# Altium PCB sonar_rev2.PcbDoc
Units mil, origin at the board's own origin, x right, y up, seen from the top; angles counter-clockwise.
Board outline 6000 x 4000 mil, 2 copper layers (Top Layer, Bottom Layer); 16 components, 15 nets, 30 pads, 0 vias.
Unrouted connection lines stored in the file: 11.
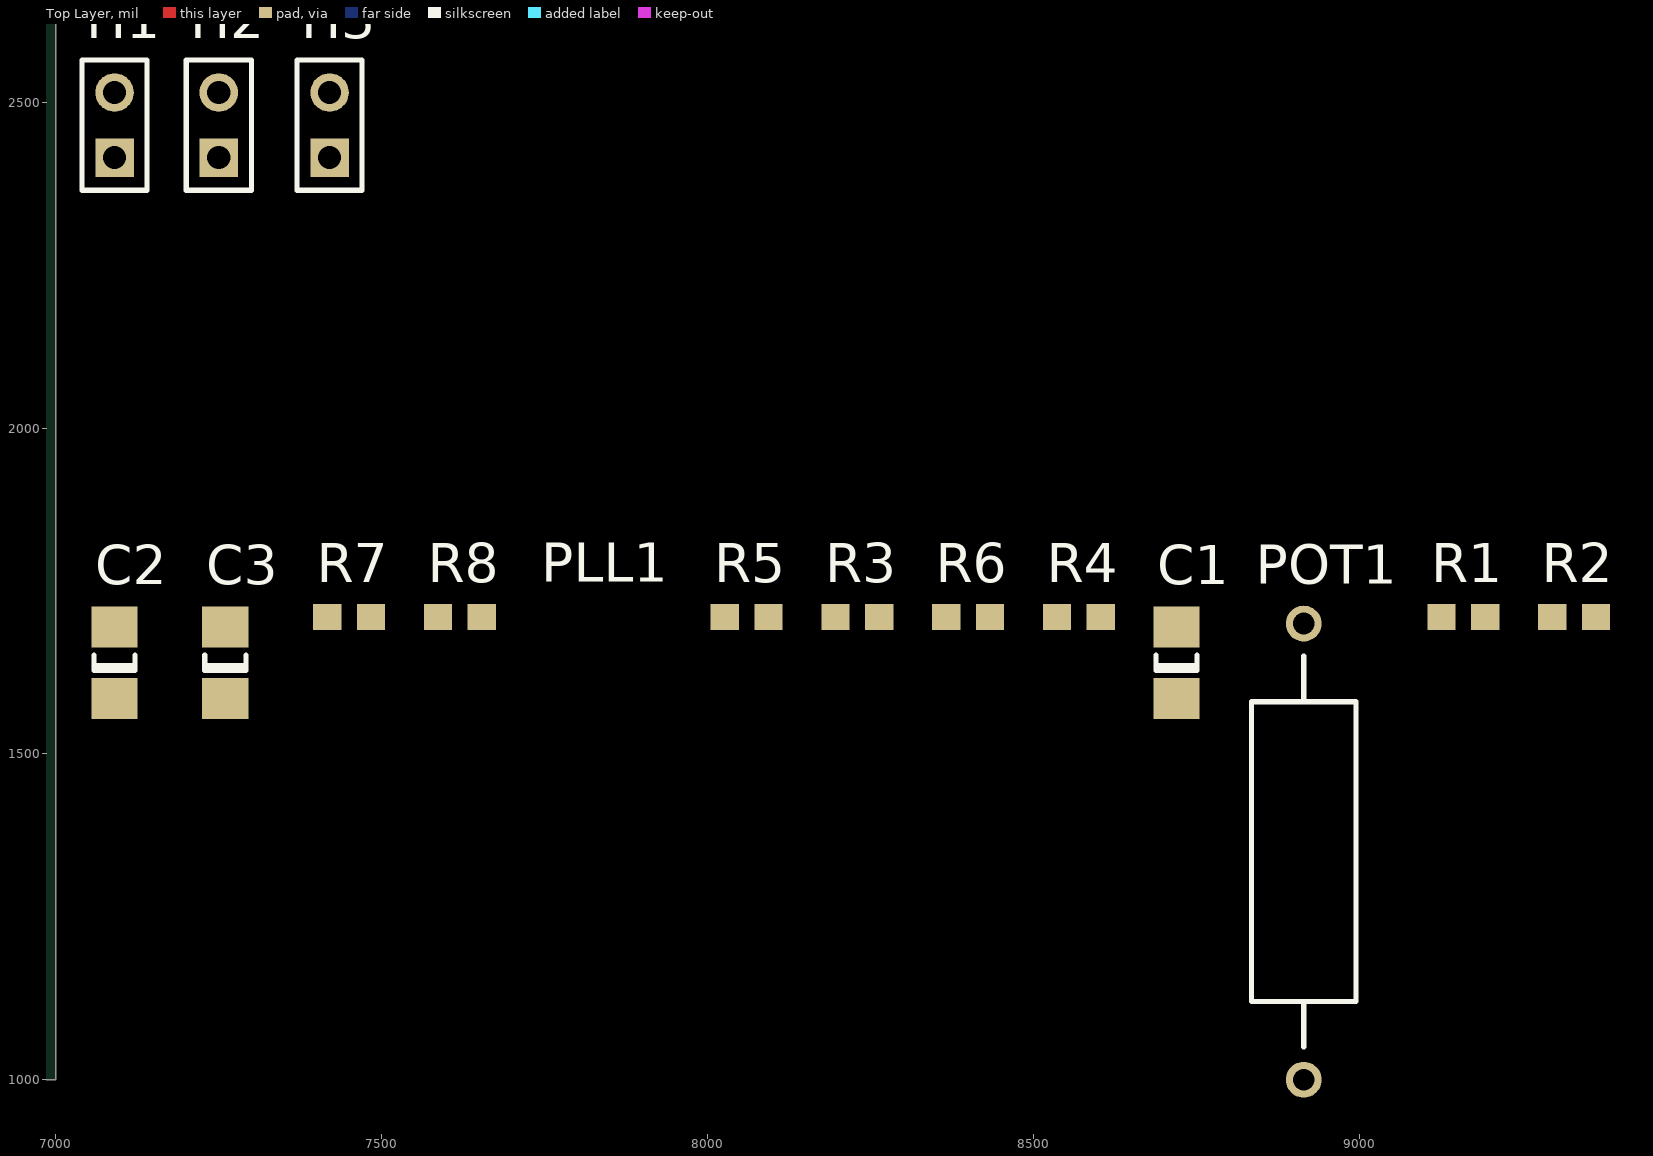
[diagram p0: Top Layer view]
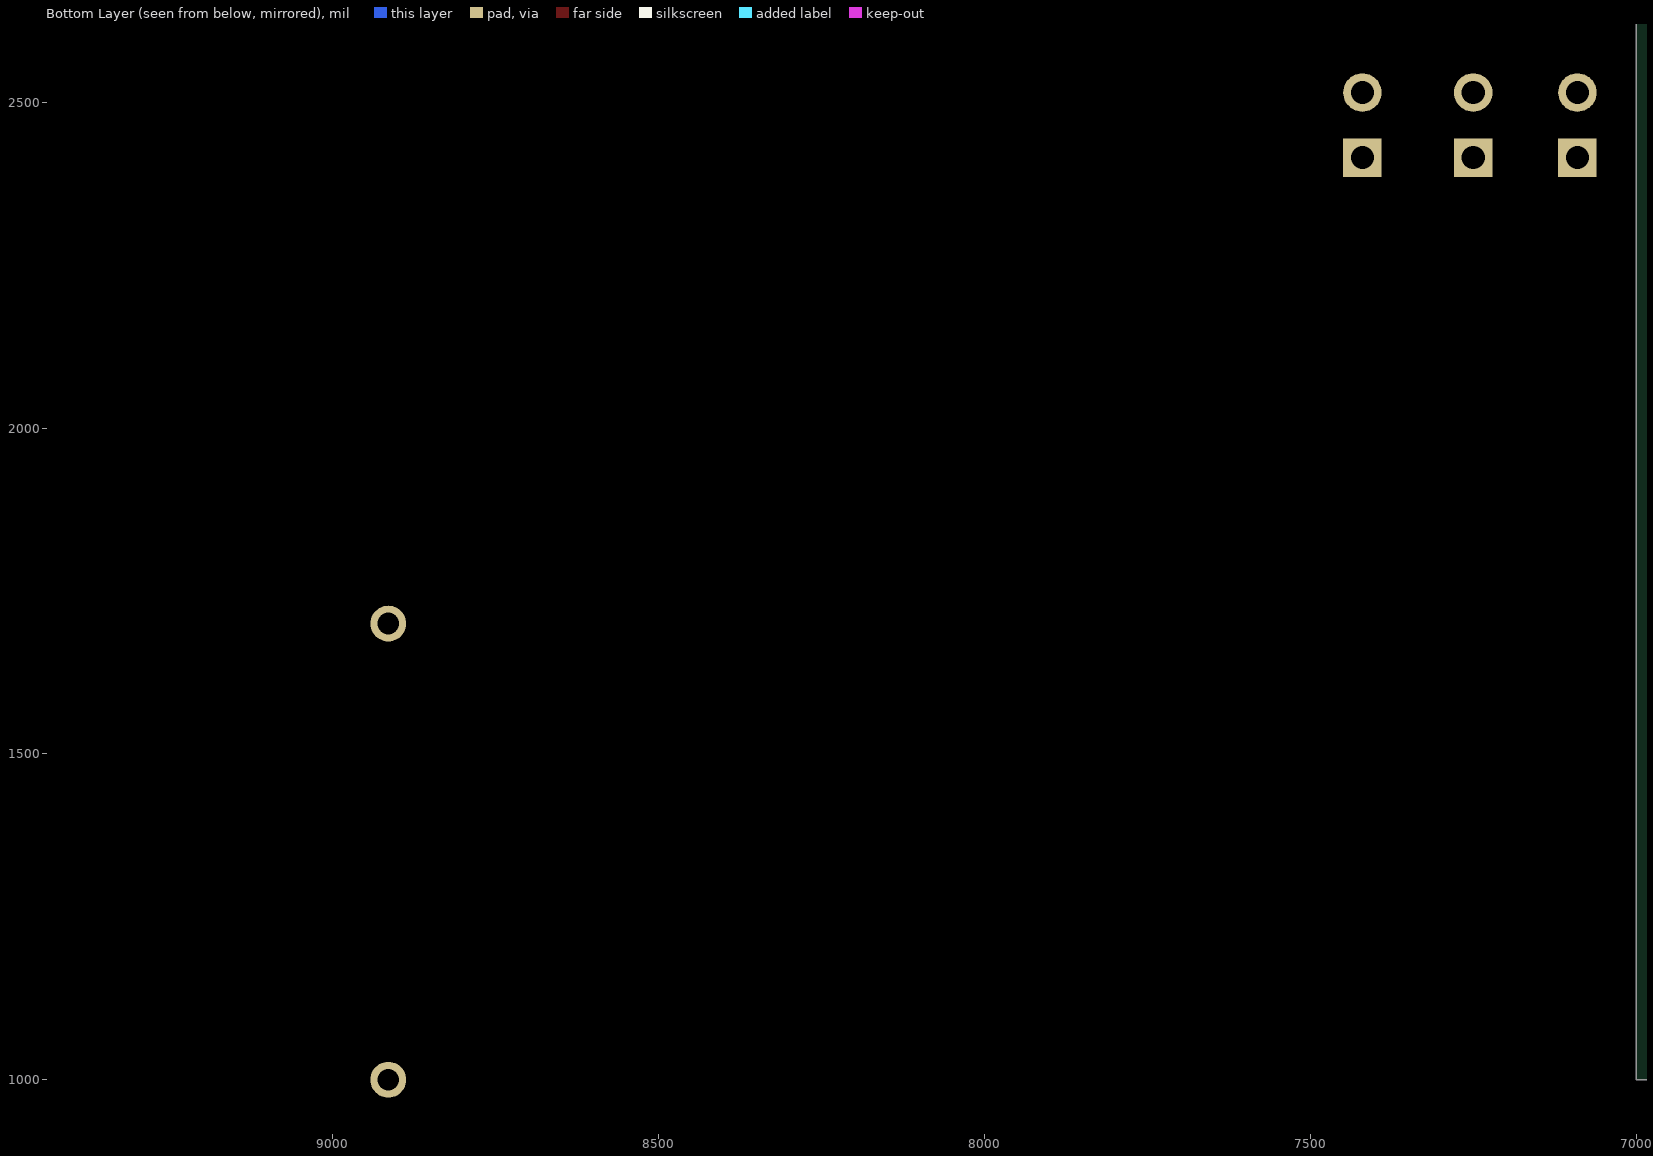
[diagram p1: Bottom Layer view, seen from below]

## Layer stack, top to bottom
Top Layer: signal copper 1.4
Dielectric: dielectric 12.6, FR-4, Dk 4.8
Bottom Layer: signal copper 1.4

## Board outline
1000,1000 7000,1000 7000,5000 1000,5000

## Design rules (kind name [scope] priority, off if disabled: settings)
Clearance [All] p1: gap=10
PolygonConnect [All] p1: connectstyle=Relief reliefconductorwidth=10 reliefentries=4 polygonreliefangle="90 Angle"
RoomDefinition top_level [InComponentClass('top_level')] p1: confinementstyle=ConfineIn formatcopy=TRUE lockcomponents=FALSE outline 7030,2355 7495,2355 7495,2675 7030,2675
RoomDefinition phase_compare [InComponentClass('phase_compare')] p2: confinementstyle=ConfineIn formatcopy=TRUE lockcomponents=FALSE outline 7045,960 9400,960 9400,1840 7045,1840
RoutingVias [All] p1: holewidth=28 width=50 viastyle="Through Hole" minholewidth=28 minwidth=50 maxholewidth=28 maxwidth=50
SilkscreenOverComponentPads [All] p1: minsilkscreentomaskgap=10
SolderMaskExpansion [All] p1: expansion=4
TestPointUsage [All] p1: valid=0 allowmultiple=FALSE
Testpoint [All] p1: side=15 testpointundercomponent=TRUE minsize=40 maxsize=100 preferedsize=60 minholesize=0 maxholesize=40 preferedholesize=32 testpointgrid=1 style=1023 order=0123456789
Width [All] p1: maxlimit=10 minlimit=10 preferedwidth=10
23 further rules are at their usual default settings.

## Classes and differential pairs
component class top_level: H1 H2 H3
component class phase_compare: C1 C2 C3 OP1 OP2 PLL1 POT1 R1 R2 R3 R4 R5 R6 R7 R8

## Components (designator, comment, footprint, x,y, rotation, side; value= is the part's Value field where it differs from the comment)
C1 "Cap Semi" C1206 8720,1640 r90 top
C2 "Cap Semi" C1206 7090,1640 r90 top
C3 "Cap Semi" C1206 7260,1640 r90 top
H1 "Header 2" HDR1X2 7090,2415 r90 top
H2 "Header 2" HDR1X2 7250,2415 r90 top
H3 "Header 2" HDR1X2 7420,2415 r90 top
PLL1 "4046 PLL" 4046PLL 7740,1730 r90 top
POT1 "Res Adj1" AXIAL-0.7 8915,1350 r90 top
R1 "Res3" J1-0603 9160,1710 r0 top
R2 "Res3" J1-0603 9330,1710 r0 top
R3 "Res3" J1-0603 8230,1710 r0 top
R4 "Res3" J1-0603 8570,1710 r0 top
R5 "Res3" J1-0603 8060,1710 r0 top
R6 "Res3" J1-0603 8400,1710 r0 top
R7 "Res3" J1-0603 7450,1710 r0 top
R8 "Res3" J1-0603 7620,1710 r0 top

## Footprints (in the part's own frame and the unit in brackets; to place one, negate y for a bottom-side part, rotate by r counter-clockwise, add the part's x,y. Pads: shape width x height; smd on the part's side, far side on the other; paste and mask are expansions set on the pad)
4046PLL [mil]
AXIAL-0.7 [mm] "Variable Resistor; 2 Leads"
  round 1.4 hole 0.85: 1(-8.89,0) 2(8.89,0)
  silkscreen extent -7.62,-2.03 7.62,2.03
C1206 [mm] "Chip Capacitor; Body 3.2 x 1.6 mm (LxW typ)"
  rect 1.6x1.8 smd: 1(-1.4,0) 2(1.4,0)
  silkscreen extent -0.3,-0.8 0.3,0.8
HDR1X2 [mm] "Connector; Header; 2 Position"
  rect 1.5x1.5 hole 0.9: 1(0,0)
  round 1.5 hole 0.9: 2(2.54,0)
  silkscreen extent -1.27,-1.27 3.81,1.27
J1-0603 [mm] "Chip Resistor; Body 1.6 x 0.8 mm (LxW typ)"
  rect 1.1x1 smd: 1(-0.85,0) 2(0.85,0)

## Part data
C1 C2 C3: "Capacitor (Semiconductor SIM Model)"
H1 H2 H3: "Header, 2-Pin"
PLL1: "CD74HC4046A"
POT1: "Variable Resistor"
R1 R2 R3 R4 R5 R6 R7 R8: "Resistor"

## Nets (pads, with @x,y where several pads share a name; then routed paths per layer and width w, separated by ;. In a path a pad name is that pad's centre, name@x,y a point inside that pad or via, vN(x,y) a via of type N, cw(c..) or ccw(c..) an arc to the next point about the centre after c; other vN are vias at no path point)
5V: 
+12V: R4.1 R6.2
-12V: 
GND: C1.1 C3.1 R3.1 R5.2 R7.2
NetC1_2: C1.2 POT1.2
NetC2_1: C2.1
NetC2_2: C2.2
NetC3_2: C3.2 R8.2
NetOP1_2: R1.2 R2.1
NetPLL1_2: R8.1
NetPLL1_11: R7.1
REF_SINE: POT1.1 R1.1 R3.2
REF_SQ: R4.2
SHIFTED_SINE: R2.2 R5.1
SHIFTED_SQ: R6.1
pads on no net: H1.1 H1.2 H2.1 H2.2 H3.1 H3.2